# EAGLE board ospi_v13 (EAGLE 6.5.0)
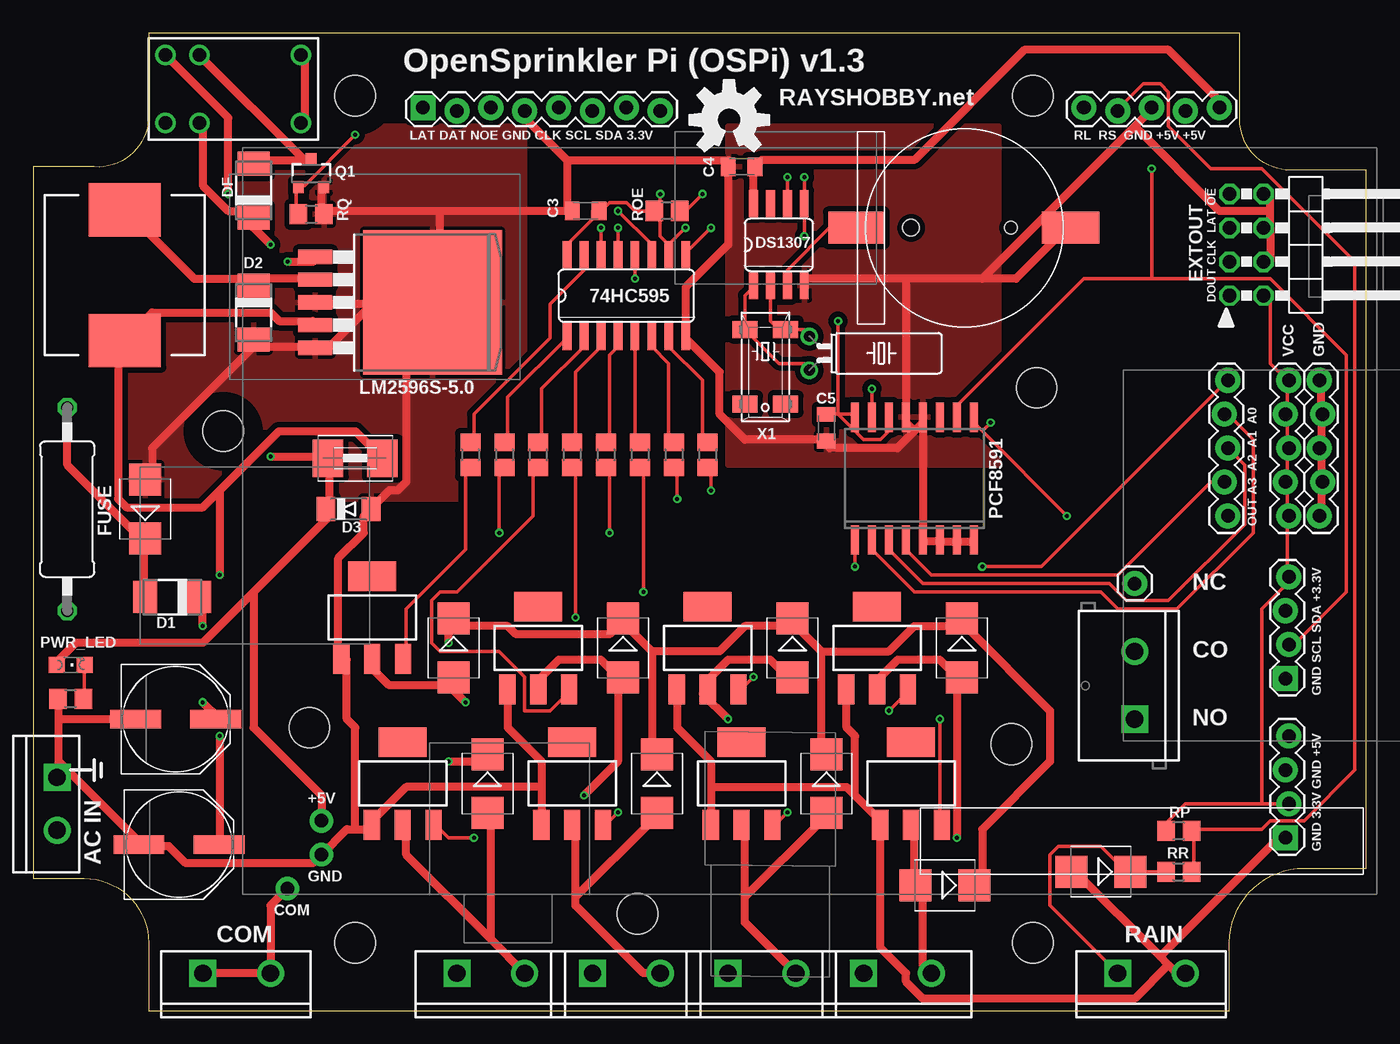
[diagram p0: board, top side]
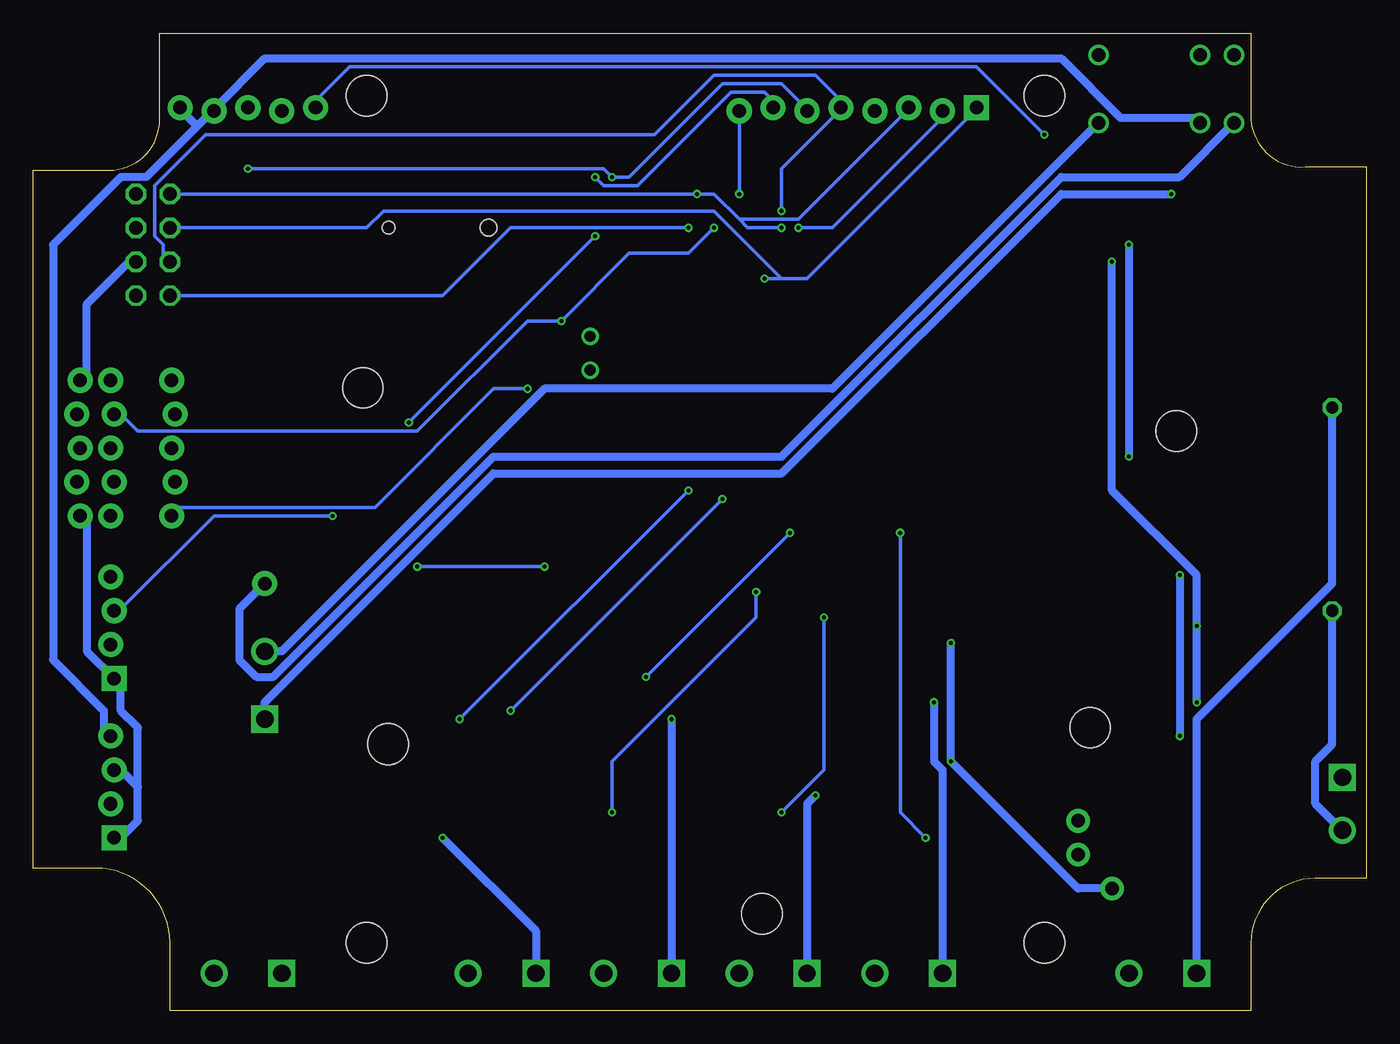
[diagram p1: board, bottom side, seen from below]

Size 99.9 x 73.25 mm. Coordinates in mm from the lower left corner, seen from the top.
Outline: 8.64,0 89.66,0 89.66,5.08 arc-90 95.25,10.67 99.9,10.67 99.9,62.99 94.23,62.99 arc-90 90.42,66.8 90.42,73.25 8.64,73.25 8.64,66.8 arc-90 4.57,63.25 0,63.25 0,9.91 3.81,9.91 arc-90 8.64,5.08 8.64,0
Copper layers (1*16): Top 0.035mm / dielectric 1.5mm / Bottom 0.035mm
Design rules "Fusion_eagle_rule_v1.1": minimum track width 6mil, minimum drill 12mil, track to track 6mil, track to pad 6mil, pad to pad 6mil, via to via 6mil, smd to smd 0mil, copper to edge 10mil, drill to drill 10mil, minimum pad ring 10mil, minimum via ring 6mil, stop-mask expansion 2mil, vias tented up to drill 100mil, thermal gap 10mil
Net classes: 0 default: width 0.254 mm, clearance 0.203 mm; 1 power: width 0.61 mm, clearance 0.203 mm
Holes 3.05 mm at 24.13,5.08 74.93,5.08 24.13,68.58 74.93,68.58
tRestrict: area 21.6,2.5 to 26.7,7.6; area 72.4,2.5 to 77.5,7.6; area 21.6,66 to 26.7,71.1; area 72.4,66 to 77.5,71.1; area 18.2,18.7 to 23.2,23.7; area 42.8,4.7 to 47.9,9.8; area 70.7,17.4 to 75.8,22.5; area 72.6,44.2 to 77.7,49.3; area 11.7,40.9 to 16.8,46
bRestrict: area 11.7,40.9 to 16.8,46; area 72.6,44.2 to 77.7,49.3; area 70.7,17.4 to 75.8,22.5; area 42.8,4.7 to 47.9,9.8; area 18.2,18.7 to 23.2,23.7
vRestrict: area 85.9,54.4 to 86.9,59.9; area 2.5,45 to 7.4,45.7

## Footprints (pad centres in the part's own frame; a part is rotated, then mirrored left to right if it is on the bottom)
SO16 = smd 0.66 x 2.032: 1 -4.445,-3.073; 2 -3.175,-3.073; 3 -1.905,-3.073; 4 -0.635,-3.073; 5 0.635,-3.073; 6 1.905,-3.073; 7 3.175,-3.073; 8 4.445,-3.073; 9 4.445,3.073; 10 3.175,3.073; 11 1.905,3.073; 12 0.635,3.073; 13 -0.635,3.073; 14 -1.905,3.073; 15 -3.175,3.073; 16 -4.445,3.073
BATTCON_12MM_SMT = smd 2.4 x 4.3: P$1 0,11.96 | smd 2.4 x 4.2: P$2 0,-4.1 | hole 0.95: 0,7.5 | hole 1.25: 0,0
PANASONIC_E = smd 3.8 x 1.4: + 3,0; - -3,0
C0805K = smd 1.1 x 1.4: 1 -1,0; 2 1,0
SCREWTERMINAL-5MM-2-X = drill 1.3 pad 2.032 square: 1 0,0 | drill 1.3 pad 2.032: 2 5.08,0
DO-214AC = smd 1.8 x 2.4: A 2.025,0; C -2.025,0
MINIMELF = smd 1.4 x 1.8: A 1.7,0; C -1.7,0
SO08 = smd 0.66 x 2.032: 1 -1.905,-3.073; 2 -0.635,-3.073; 3 0.635,-3.073; 4 1.905,-3.073; 5 1.905,3.073; 6 0.635,3.073; 7 -0.635,3.073; 8 -1.905,3.073
2X04/90 = drill 1.016 octagon: 1 -3.81,-6.35; 2 -3.81,-3.81; 3 -1.27,-6.35; 4 -1.27,-3.81; 5 1.27,-6.35; 6 1.27,-3.81; 7 3.81,-6.35; 8 3.81,-3.81
1812 = smd 2.286 x 2.794: 1 -2.046,0; 2 2.046,0
0411/15 = drill 0.914 octagon: 1 -7.62,0; 2 7.62,0
SCREWTERMINAL-4MM-2-X = drill 1.3 pad 2.032 square: 1 0,0 | drill 1.3 pad 2.032: 2 3.96,0
1X01 = drill 1.016 pad 1.88: 1 0,0
1X05_LOCK = drill 1.016 pad 1.88: 1 0,0.127; 2 2.54,-0.127; 3 5.08,0.127; 4 7.62,-0.127; 5 10.16,0.127
1X04_LOCK = drill 1.016 pad 1.88 square: 1 0,0.127 | drill 1.016 pad 1.88: 2 2.54,-0.127; 3 5.08,0.127; 4 7.62,-0.127
1X08_LOCK = drill 1.016 pad 1.88 square: 1 0,0.127 | drill 1.016 pad 1.88: 2 2.54,-0.127; 3 5.08,0.127; 4 7.62,-0.127; 5 10.16,0.127; 6 12.7,-0.127; 7 15.24,0.127; 8 17.78,-0.127
CDRH125 = smd 5.4 x 4: 1 0,4.9; 2 0,-4.9
TO263-5 = smd 1.067 x 2.54: 1 -3.404,-5.791; 2 -1.702,-5.791; 3 0,-5.791; 4 1.702,-5.791; 5 3.404,-5.791 | smd 10.8 x 10.41: 6 0,3
SO16W = smd 0.6 x 2.2: 1 -4.445,-4.6; 2 -3.175,-4.6; 3 -1.905,-4.6; 4 -0.635,-4.6; 5 0.635,-4.6; 6 1.905,-4.6; 7 3.175,-4.6; 8 4.445,-4.6; 9 4.445,4.6; 10 3.175,4.6; 11 1.905,4.6; 12 0.635,4.6; 13 -0.635,4.6; 14 -1.905,4.6; 15 -3.175,4.6; 16 -4.445,4.6
CHIPLED_0805 = smd 1.2 x 1.2: A 0,-1.05; C 0,1.05
SOT23-3 = smd 0.8 x 0.9: 1 -0.95,-1; 2 0.95,-1; 3 0,1.1
R0805 = smd 1.3 x 1.5: 1 -0.95,0; 2 0.95,0
RELAY-G5V = drill 1.016: 1 5.08,2.54; 2 2.54,2.54; 5 -5.08,2.54; 6 -5.08,-2.54; 9 2.54,-2.54; 10 5.08,-2.54
SCREWTERMINAL-5MM-2 = drill 1.3 pad 2.032 square: 1 0,0 | drill 1.3 pad 2.032: 2 5.08,0
SOT223 = smd 1.219 x 2.235: 1 -2.311,-3.099; 2 0,-3.099; 3 2.311,-3.099 | smd 3.6 x 2.2: 4 0,3.099
1X01-CLEANBIG = drill 1.016 pad 1.778: 1 0,0
SMB = smd 2.4 x 2.4: A 2.2,0; C -2.2,0
OSPI = hole 3.048: 25,-6; 53,6.735; 84.06,-29.465 | hole 3: 77.6,-7.225; 23.1,-32.725
MM20SS = smd 1.27 x 1.88: 1 -2.794,-1.524; 2 2.794,-1.524; 3 2.794,1.524; 4 -2.794,1.524
TC38H = drill 0.813: 1 -1.27,0; 2 1.27,0

## Placement (x,y rotation side)
74HC595  74HC595N  [SO16]  44.45,53.59 0 top
BAT1  [BATTCON_12MM_SMT]  65.79,58.67 270 top
C1  100u/50V  [PANASONIC_E]  10.67,21.84 0 top
C2  100u  [PANASONIC_E]  10.92,12.45 0 top
C3  0.1u  [C0805K]  41.4,59.94 180 top
C4  0.1u  [C0805K]  53.09,63.25 180 top
C5  0.1u  [C0805K]  59.44,43.69 270 top
COM  [SCREWTERMINAL-5MM-2-X]  12.7,2.79 0 top
D1  S1B  [DO-214AC]  10.41,30.99 180 top
D2  SS24  [DO-214AC]  16.51,52.32 270 top
D3  5.6V  [MINIMELF]  23.62,37.59 0 top
DF  S1B  [DO-214AC]  16.51,61.47 90 top
DS1307  DS1307  [SO08]  55.88,57.4 0 top
EXTOUT1  [2X04/90]  96.01,57.4 270 top
F2  [1812]  24.13,41.4 180 top
FUSE  2A  [0411/15]  2.54,37.59 90 top
J0  24VAC IN  [SCREWTERMINAL-4MM-2-X]  1.78,17.48 270 top
JP1  M01PTH  [1X01]  82.55,32 0 top
JP2  [1X05_LOCK]  78.74,67.56 0 top
JP3  [1X04_LOCK]  93.98,12.95 90 top
JP4  [1X04_LOCK]  93.98,24.89 90 top
JP5  [1X05_LOCK]  89.41,47.24 270 top
JP6  [1X05_LOCK]  93.98,47.24 270 top
JP7  [1X05_LOCK]  96.52,37.08 90 top
JP8  [1X08_LOCK]  29.21,67.56 0 top
L1  100uH  [CDRH125]  6.86,55.12 0 top
LM2596S-5.0  [TO263-5]  26.92,53.09 270 top
PCF8591  PCF8591T  [SO16W]  66.04,39.88 0 top
PWR_LED  [CHIPLED_0805]  2.79,25.91 270 top
Q1  2N7002  [SOT23-3]  20.83,62.74 0 top
R1  330  [R0805]  32.77,41.66 270 top
R2  330  [R0805]  35.31,41.66 270 top
R3  330  [R0805]  37.85,41.66 270 top
R4  330  [R0805]  40.39,41.66 270 top
R5  330  [R0805]  42.93,41.66 270 top
R6  330  [R0805]  45.47,41.66 270 top
R7  330  [R0805]  48.01,41.66 270 top
R8  330  [R0805]  50.55,41.66 270 top
RAIN  [SCREWTERMINAL-5MM-2-X]  81.28,2.79 0 top
RELAY  RELAY-2G5Q  [RELAY-G5V]  14.99,69.09 180 top
RLED  1K  [R0805]  2.79,23.37 180 top
RLPORT  [SCREWTERMINAL-5MM-2]  82.55,21.84 90 top
ROE  10K  [R0805]  47.5,59.94 180 top
RP  330  [R0805]  85.85,13.46 180 top
RQ  10K  [R0805]  20.83,59.69 0 top
RR  4.7K  [R0805]  85.85,10.41 0 top
S12  [SCREWTERMINAL-5MM-2-X]  31.75,2.79 0 top
S34  [SCREWTERMINAL-5MM-2-X]  41.91,2.79 0 top
S56  [SCREWTERMINAL-5MM-2-X]  52.07,2.79 0 top
S78  [SCREWTERMINAL-5MM-2-X]  62.23,2.79 0 top
T1  MAC97  [SOT223]  25.4,29.46 0 top
T2  MAC97  [SOT223]  27.69,17.02 0 top
T3  MAC97  [SOT223]  37.85,27.18 0 top
T4  MAC97  [SOT223]  40.39,17.02 0 top
T5  MAC97  [SOT223]  50.55,27.18 0 top
T6  MAC97  [SOT223]  53.09,17.02 0 top
T7  MAC97  [SOT223]  63.25,27.18 0 top
T8  MAC97  [SOT223]  65.79,17.02 0 top
TP1  [1X01-CLEANBIG]  19.05,9.14 0 top
TP2  [1X01-CLEANBIG]  21.59,11.68 0 top
TP3  [1X01-CLEANBIG]  21.59,14.22 0 top
TVS0  SMBJ48CA  [SMB]  8.38,37.59 90 top
TVS1  [SMB]  31.5,27.18 270 top
TVS2  [SMB]  34.04,17.02 270 top
TVS3  [SMB]  44.2,27.18 270 top
TVS4  [SMB]  46.74,17.02 270 top
TVS5  [SMB]  56.9,27.18 270 top
TVS6  [SMB]  59.44,17.02 270 top
TVS7  [SMB]  69.6,27.18 270 top
TVS8  [SMB]  68.33,9.4 180 top
TVSR  [SMB]  80.01,10.41 180 top
U$2  OSPI  [OSPI]  98.3,13.97 180 top
X1  32.768kHz  [MM20SS]  54.86,48.26 270 top
X1'  32.768kHz  [TC38H]  58.17,49.28 270 top

## Library data of the parts
74HC595 COM J0 JP1-JP8 RAIN RLPORT S12 S34 S56 S78 T1-T8 = SparkFun
BAT1 L1 Q1 RELAY = SparkFunNew
C1 C2 = resistor
C3-C5 DS1307 F2 PWR_LED TP1-TP3 = adafruit
D1-D3 DF TVS0 TVS1-TVS8 TVSR = diode
EXTOUT1 = pinhead
FUSE R1-R8 RLED ROE RP RQ RR = rcl
LM2596S-5.0 = national-semiconductor; MF: NATIONAL SEMICONDUCTOR; MPN: LM2596S-ADJ/NOPB; OC_FARNELL: 9494367; OC_NEWARK: 41K3842
PCF8591 = micro-philips; MPN: PCF8591T/2,512; OC_FARNELL: 1826767; OC_NEWARK: 70R6911
U$2 = RaspberryPi
X1 X1' = crystal; OC_FARNELL: unknown; OC_NEWARK: unknown

## Nets
24VAC [power]: COM.1 COM.2 D1.A FUSE.2 TP1.1 TVS0.C TVS1.C TVS2.C TVS3.C TVS4.C TVS5.C TVS6.C TVS7.C TVS8.C
A1: 74HC595.13 EXTOUT1.1 JP8.3 ROE.1
ACIN [power]: FUSE.1 J0.2
AIN0: JP5.1 PCF8591.1
AIN1: JP5.2 PCF8591.2
AIN2: JP5.3 PCF8591.3
AIN3: JP5.4 PCF8591.4
AOUT: JP5.5 PCF8591.15
CO [power]: RELAY.5 RELAY.6 RLPORT.2
D5: 74HC595.14 JP8.2
D6: 74HC595.11 EXTOUT1.5 JP8.5
D7: 74HC595.12 EXTOUT1.3 JP8.1
GND [power]: 74HC595.8 BAT1.P$1 C1.- C2.- C3.2 C4.2 C5.2 D2.A D3.A DS1307.4 EXTOUT1.2 EXTOUT1.4 EXTOUT1.6 J0.1 JP2.3 JP3.1 JP3.3 JP4.1 JP7.1 JP7.2 JP7.3 JP7.4 JP7.5 JP8.4 LM2596S-5.0.3 LM2596S-5.0.5 LM2596S-5.0.6 PCF8591.5 PCF8591.6 PCF8591.7 PCF8591.8 PCF8591.12 PCF8591.13 Q1.2 RAIN.2 RLED.2 RQ.2 T1.1 T2.1 T3.1 T4.1 T5.1 T6.1 T7.1 T8.1 TP2.1 TVS0.A TVSR.A
N$1: PWR_LED.C RLED.1
N$2 [power]: C1.+ D1.C LM2596S-5.0.1
N$3: R1.2 T1.3
N$4: 74HC595.5 R6.1
N$5: 74HC595.6 R7.1
N$7: 74HC595.7 R8.1
N$8 [power]: D2.C L1.1 LM2596S-5.0.2
N$9: DS1307.1 X1'.2 X1.1
N$10: 74HC595.4 R5.1
N$11: 74HC595.3 R4.1
N$12: 74HC595.2 R3.1
N$13: 74HC595.1 R2.1
N$14: 74HC595.15 R1.1
N$15: R2.2 T2.3
N$16 [power]: S12.1 T1.2 TVS1.A
N$17 [power]: S12.2 T2.2 TVS2.A
N$18 [power]: S34.1 T3.2 TVS3.A
N$19: R3.2 T3.3
N$20 [power]: S34.2 T4.2 TVS4.A
N$21: R4.2 T4.3
N$22 [power]: S56.1 T5.2 TVS5.A
N$23 [power]: S56.2 T6.2 TVS6.A
N$24 [power]: S78.1 T7.2 TVS7.A
N$25 [power]: S78.2 T8.2 TVS8.A
N$26: R5.2 T5.3
N$27: R6.2 T6.3
N$28: R7.2 T7.3
N$29: R8.2 T8.3
N$30: DS1307.2 X1'.1 X1.4
N$31: RAIN.1 RR.1 TVSR.C
N$36: BAT1.P$2 DS1307.3
N$77 [power]: DF.A Q1.3 RELAY.9
NC [power]: JP1.1 RELAY.1
NO [power]: RELAY.10 RLPORT.1
QH*: 74HC595.9 EXTOUT1.7
RL: JP2.1 Q1.1 RQ.1
RS: JP2.2 RP.1 RR.2
SCL: DS1307.6 JP4.2 JP8.6 PCF8591.10
SDA: DS1307.5 JP4.3 JP8.7 PCF8591.9
VCC: 74HC595.10 74HC595.16 C3.1 C5.1 EXTOUT1.8 JP3.2 JP4.4 JP6.1 JP6.2 JP6.3 JP6.4 JP6.5 JP8.8 PCF8591.14 PCF8591.16 ROE.2 RP.2
VIN [power]: C4.1 D3.C DF.C DS1307.8 F2.2 JP2.4 JP2.5 JP3.4 PWR_LED.A RELAY.2 TP3.1
VIN_PRE [power]: C2.+ F2.1 L1.2 LM2596S-5.0.4

## Tracks (layer width: path | path; a pad name or v marks a point on that pad's centre or on a via)
24VAC  (via drill 0.3)
  Top 0.61: 46.35,26.92 46.35,19.3 TVS4.C | 46.35,26.92 44.45,28.83 TVS3.C 43.81,28.83 43.18,28.19 36.2,28.19 35.56,28.83 31.75,28.83 TVS1.C 31.11,28.83 v31.11,27.56 | 59.05,26.92 57.15,28.83 TVS5.C 56.52,28.83 53.34,28.83 51.44,26.92 46.35,26.92 | 59.05,26.92 59.05,19.3 TVS6.C | 59.05,26.92 64.14,26.92 66.04,28.83 69.22,28.83 TVS7.C 69.85,28.83 76.2,22.48 76.2,18.67 71.12,13.59 71.12,9.78 TVS8.C | 8.26,35.18 8.26,31.37 D1.A | FUSE.2 2.54,40.89 8.26,35.18 | 8.26,35.18 TVS0.C | COM.1 COM.2 17.78,7.87 TP1.1 | v31.11,18.67 33.66,18.67 TVS2.C
  Bottom 0.61: TP1.1 21.59,9.14 v31.11,18.67 v31.11,27.56 | FUSE.2 2.54,32 12.7,21.84 COM.1
A1  (via drill 0.3)
  Top 0.254: v50.16,61.21 48.9,59.94 ROE.1 | v43.81,58.67 74HC595.13
  Bottom 0.254: EXTOUT1.1 v50.16,61.21 48.9,61.21 46.99,59.31 | v43.81,58.67 46.35,58.67 46.99,59.31 | 46.99,59.31 42.55,59.31 34.29,67.56 JP8.3
ACIN
  Bottom 0.61: FUSE.1 2.54,19.94 3.81,18.67 3.81,15.49 1.91,13.59 J0.2
AIN0  (via drill 0.3)
  Top 0.254: v61.59,33.27 PCF8591.1 | v71.12,33.27 75.56,33.27 JP5.1
  Bottom 0.254: v71.12,33.27 v61.59,33.27
AIN1
  Top 0.254: PCF8591.2 62.87,34.54 66.04,31.37 80.01,31.37 81.28,30.1 85.72,30.1 91.44,35.81 91.44,42.8 89.53,44.7 JP5.2
AIN2
  Top 0.254: PCF8591.3 64.14,34.54 66.67,32 80.64,32 81.92,30.73 85.09,30.73 90.81,36.45 90.81,40.89 JP5.3
AIN3
  Top 0.254: PCF8591.4 65.41,34.54 67.31,32.64 81.28,32.64 88.27,39.62 JP5.4
AOUT  (via drill 0.3)
  Top 0.254: v62.87,46.61 PCF8591.15
  Bottom 0.254: v62.87,46.61 65.41,46.61 74.3,37.72 88.9,37.72 JP5.5
CO
  Top 0.61: RELAY.5 20.32,66.93 20.32,71.37 RELAY.6
  Bottom 0.61: RLPORT.2 81.28,26.92 61.59,46.61 40.01,46.61 RELAY.5
D5  (via drill 0.3)
  Top 0.254: v42.55,58.67 74HC595.14
  Bottom 0.254: v42.55,58.67 40.01,58.67 31.75,66.93 JP8.2
D6  (via drill 0.3)
  Top 0.254: 74HC595.11 46.35,57.4 v43.81,59.94
  Bottom 0.254: v43.81,59.94 43.81,63.12 39.37,67.56 JP8.5 39.37,68.2 41.27,70.1 48.9,70.1 53.34,65.66 87,65.66 90.81,61.85 90.81,58.04 90.17,57.4 90.17,56.13 EXTOUT1.5
D7  (via drill 0.3)
  Top 0.254: v45.09,54.86 74HC595.12
  Bottom 0.254: 43.81,54.86 41.91,54.86 29.21,67.56 JP8.1 | 43.81,54.86 v45.09,54.86 | EXTOUT1.3 74.93,58.67 73.66,59.94 48.9,59.94 43.81,54.86
GND
  Top 0.61: 1.91,18.67 1.91,18.03 J0.1 | 1.91,18.67 1.91,21.84 | 1.91,21.84 1.91,23.11 RLED.2 | 1.91,21.84 C1.- | 1.91,18.67 7.62,12.95 C2.- 8.26,12.32 10.16,12.32 11.43,11.05 20.95,11.05 TP2.1 23.5,13.59 24.13,13.59 | 24.13,13.59 25.4,13.59 T2.1 25.4,14.22 27.94,16.76 38.1,16.76 | 38.1,16.76 38.1,18.67 35.56,21.21 35.56,23.75 T3.1 | 38.1,16.76 38.1,14.22 T4.1 | 24.13,13.59 24.13,21.21 23.5,21.84 23.5,26.29 T1.1 22.86,26.92 22.86,33.91 24.77,35.81 24.77,37.08 D3.A 25.4,37.72 26.67,38.99 27.3,38.99 27.94,39.62 27.94,52.96 | Q1.2 21.59,61.85 21.59,59.94 RQ.2 22.23,59.94 30.48,59.94 | 40.01,63.75 40.01,59.94 | 40.01,63.75 36.83,66.93 JP8.4 | 40.01,63.75 52.07,63.75 C4.2 52.07,63.12 52.07,57.4 48.9,54.23 74HC595.8 48.9,50.42 51.44,47.88 51.44,44.7 53.34,42.8 59.05,42.8 C5.2 59.69,42.16 64.77,42.16 66.04,43.43 | 40.01,59.94 30.48,59.94 | 40.01,59.94 C3.2 | 16.51,49.78 8.89,42.16 8.89,40.26 TVS0.A | 16.51,49.78 20.95,49.78 LM2596S-5.0.5 21.59,49.78 22.23,49.78 25.4,52.96 | 16.51,49.78 D2.A | 27.94,52.96 29.84,52.96 LM2596S-5.0.6 | 27.94,52.96 25.4,52.96 | 25.4,52.96 21.59,52.96 LM2596S-5.0.3 | 25.4,52.96 LM2596S-5.0.6 | 30.48,59.94 30.48,53.59 LM2596S-5.0.6 | 27.94,52.96 LM2596S-5.0.6 | 67.94,35.18 66.67,35.18 PCF8591.5 66.67,44.07 | 67.94,35.18 69.22,35.18 | 67.94,35.18 PCF8591.6 | 69.22,35.18 70.48,35.18 PCF8591.8 | 69.22,35.18 PCF8591.7 | 66.67,44.07 66.04,43.43 | 66.04,43.43 65.41,44.07 PCF8591.13 65.41,54.86 | 66.67,44.07 PCF8591.12 | 71.12,54.86 73.66,54.86 77.47,58.67 BAT1.P$1 | 71.12,54.86 65.41,54.86 | 65.41,54.86 57.78,54.86 DS1307.4 | 71.12,54.86 82.55,66.29 | 82.55,66.29 83.82,67.56 JP2.3
  Top 0.61: 92.71,58.67 92.71,56.13 EXTOUT1.6 | 92.71,58.67 92.71,59.94 | 92.71,59.94 92.71,61.21 EXTOUT1.2 | 92.71,58.67 EXTOUT1.4 | 96.52,44.7 96.52,42.16 | 96.52,44.7 96.52,47.24 JP7.5 | 96.52,44.7 JP7.4 | 96.52,42.16 96.52,39.62 | 96.52,42.16 JP7.3 | 96.52,39.62 96.52,37.08 JP7.1 | 96.52,39.62 JP7.2 | 50.8,16.76 50.8,18.67 48.26,21.21 48.26,23.75 T5.1 | 50.8,16.76 50.8,14.22 T6.1 | 61.59,16.13 60.96,16.76 50.8,16.76 | 61.59,16.13 63.5,14.22 T8.1 63.5,13.59 63.5,4.7 65.41,2.79 65.41,2.16 66.67,0.89 82.55,0.89 85.09,3.43 | 61.59,16.13 61.59,20.57 60.96,21.21 60.96,23.75 T7.1 | 85.09,3.43 85.72,2.79 RAIN.2 | 85.09,3.43 84.45,4.06 | 84.45,4.06 78.11,10.41 TVSR.A | 84.45,4.06 93.34,12.95 JP3.1 | 82.55,66.29 88.9,59.94 92.71,59.94
  Bottom 0.61: JP7.1 95.89,37.08 95.89,26.92 JP4.1 93.34,24.38 93.34,22.48 92.08,21.21 92.08,16.76 | EXTOUT1.6 92.71,56.13 95.89,52.96 95.89,47.24 JP7.5 | 92.08,16.76 93.34,18.03 JP3.3 | 92.08,16.76 92.08,14.22 93.34,12.95 JP3.1
  pour Top (isolate 0.406): 0,66.29 36.83,66.29 36.83,38.35 0,38.35
  pour Top (isolate 0.406): 52.07,66.29 72.39,66.29 72.39,40.89 52.07,40.89
N$1
  Top 0.254: PWR_LED.C 3.81,25.65 3.81,23.75 RLED.1
N$2  (via drill 0.3)
  Top 0.61: v12.7,28.83 12.7,30.73 D1.C | v12.7,23.11 13.97,21.84 C1.+ | v19.05,56.13 20.95,56.13 LM2596S-5.0.1
  Bottom 0.61: v12.7,23.11 v12.7,28.83 12.7,32.64 19.05,38.99 v19.05,56.13
N$3
  Top 0.254: R1.2 32.38,40.26 32.38,34.54 27.94,30.1 27.94,26.92 T1.3
N$4
  Top 0.254: 74HC595.5 45.09,42.8 R6.1
N$5
  Top 0.254: 74HC595.6 46.35,49.78 47.62,48.51 47.62,42.8 R7.1
N$7
  Top 0.254: 74HC595.7 47.62,49.78 50.16,47.24 50.16,42.8 R8.1
N$8
  Top 0.61: 16.51,54.86 20.95,54.86 LM2596S-5.0.2 | 16.51,54.86 12.06,54.86 6.99,59.94 L1.1 | 16.51,54.86 D2.C
N$9
  Top 0.254: DS1307.1 53.98,54.23 53.34,53.59 X1.1 55.88,48.51 57.78,48.51 X1'.2
N$10
  Top 0.254: 74HC595.4 43.81,49.78 43.18,49.15 43.18,42.8 R5.1
N$11
  Top 0.254: 74HC595.3 42.55,49.78 40.64,47.88 40.64,42.8 R4.1
N$12
  Top 0.254: 74HC595.2 41.27,49.78 38.1,46.61 38.1,42.8 R3.1
N$13
  Top 0.254: R2.1 35.56,42.8 35.56,45.97 40.01,50.42 74HC595.1
N$14
  Top 0.254: 74HC595.15 41.27,55.5 38.73,52.96 38.73,50.42 33.02,44.7 33.02,42.8 R1.1
N$15  (via drill 0.3)
  Top 0.254: v34.92,35.81 34.92,40.26 R2.2 | v33.02,12.95 31.11,12.95 30.48,13.59 T2.3
  Bottom 0.254: v34.92,35.81 34.92,14.86 v33.02,12.95
N$16  (via drill 0.3)
  Top 0.61: T1.2 25.4,25.65 26.67,24.38 31.11,24.38 | 31.11,24.38 v32.38,23.11 | 31.11,24.38 TVS1.A
  Bottom 0.61: S12.1 31.75,18.03 32.38,18.67 v32.38,23.11
N$17
  Top 0.61: S12.2 34.29,5.33 | 34.29,5.33 27.94,11.68 27.94,13.59 T2.2 | 34.29,5.33 34.29,14.22 TVS2.A
N$18  (via drill 0.3)
  Top 0.61: T3.2 38.1,24.38 38.1,25.02 39.37,26.29 42.55,26.29 43.81,25.02 TVS3.A 43.81,24.38 43.81,18.67 v41.27,16.13
  Bottom 0.61: S34.1 41.91,15.49 v41.27,16.13
N$19
  Top 0.254: R3.2 37.47,40.26 37.47,37.08 31.75,31.37 30.48,31.37 29.84,30.73 29.84,27.56 30.48,26.92 34.92,26.92 36.83,25.02 36.83,22.48 38.73,22.48 40.01,23.75 T3.3
N$20
  Top 0.61: 40.64,8.51 40.64,7.87 45.72,2.79 S34.2 | 40.64,8.51 40.64,13.59 T4.2 | 40.64,8.51 46.35,14.22 TVS4.A
N$21  (via drill 0.3)
  Top 0.254: v40.64,29.46 40.64,40.26 R4.2 | v43.81,14.86 43.18,14.22 T4.3
  Bottom 0.254: v40.64,29.46 40.64,18.03 v43.81,14.86
N$22  (via drill 0.3)
  Top 0.61: TVS5.A 56.52,25.02 55.24,26.29 52.07,26.29 50.8,25.02 50.8,24.38 T5.2 50.16,23.75 v52.07,21.84
  Bottom 0.61: v52.07,21.84 S56.1
N$23
  Top 0.61: 53.34,8.51 53.34,6.6 S56.2 | 53.34,8.51 53.34,13.59 T6.2 | 53.34,8.51 59.05,14.22 TVS6.A
N$24  (via drill 0.3)
  Top 0.61: T7.2 63.5,24.38 63.5,25.02 64.77,26.29 67.94,26.29 69.22,25.02 TVS7.A 69.22,24.38 v69.22,12.95
  Bottom 0.61: S78.1 62.23,5.97 v69.22,12.95
N$25
  Top 0.61: T8.2 66.04,13.59 66.04,9.78 TVS8.A 66.67,9.14 66.67,3.43 S78.2
N$26  (via drill 0.3)
  Top 0.254: v43.18,35.81 43.18,40.26 R5.2 | v53.98,25.02 53.34,24.38 T5.3
  Bottom 0.254: v53.98,25.02 v43.18,35.81
N$27  (via drill 0.3)
  Top 0.254: v45.72,31.37 45.72,40.26 R6.2 | v56.52,14.86 55.88,14.22 T6.3
  Bottom 0.254: v45.72,31.37 45.72,29.46 56.52,18.67 v56.52,14.86
N$28  (via drill 0.3)
  Top 0.254: v48.26,38.35 48.26,40.26 R7.2 | v64.14,22.48 65.41,23.75 T7.3
  Bottom 0.254: v64.14,22.48 v48.26,38.35
N$29  (via drill 0.3)
  Top 0.254: v50.8,38.99 50.8,40.26 R8.2 | v67.94,21.84 67.94,14.22 T8.3
  Bottom 0.254: v67.94,21.84 v50.8,38.99
N$30
  Top 0.254: X1'.1 57.78,51.05 X1.4 55.88,51.05 55.24,51.69 DS1307.2
N$31
  Top 0.254: RR.1 TVSR.C 81.92,10.41 80.01,12.32 76.83,12.32 76.2,11.68 76.2,7.87 RAIN.1
N$36
  Top 0.254: DS1307.3 56.52,55.5 59.69,58.67 BAT1.P$2
N$77
  Top 0.61: 20.32,63.75 16.51,63.75 DF.A | 20.32,63.75 20.95,63.75 Q1.3 | 20.32,63.75 RELAY.9
NC
  Bottom 0.61: RELAY.1 13.97,62.48 22.86,62.48 43.81,41.53 65.41,41.53 81.92,25.02 83.19,25.02 84.45,26.29 84.45,30.1 JP1.1
NO  (via drill 0.3)
  Top 0.61: RELAY.10 14.61,66.93 v14.61,61.21
  Bottom 0.61: v14.61,61.21 22.86,61.21 43.81,40.26 65.41,40.26 82.55,23.11 RLPORT.1
QH*  (via drill 0.3)
  Top 0.254: v50.8,58.67 48.9,56.77 74HC595.9
  Bottom 0.254: v50.8,58.67 64.14,58.67 69.22,53.59 EXTOUT1.7
RL  (via drill 0.3)
  Top 0.254: 19.68,61.85 19.68,59.94 RQ.1 | 19.68,61.85 20.32,61.85 v24.13,65.66 | 19.68,61.85 Q1.1
  Bottom 0.254: v24.13,65.66 29.21,70.74 76.2,70.74 78.74,68.2 JP2.1
RS
  Top 0.254: RR.2 87,10.41 87,12.95 RP.1 87,13.59 92.08,13.59 92.71,14.22 95.25,14.22 99.06,18.03 99.06,56.13 92.08,63.12 88.27,63.12 85.09,66.29 85.09,68.83 84.45,69.47 83.19,69.47 81.28,67.56 JP2.2
SCL  (via drill 0.3)
  Top 0.254: v56.52,62.48 DS1307.6 | PCF8591.10 69.22,45.34 78.74,54.86 83.82,54.86 | 83.82,54.86 92.71,54.86 98.42,49.15 98.42,31.37 94.61,27.56 JP4.2 | 83.82,54.86 v83.82,63.12
  Bottom 0.254: JP8.6 41.91,67.56 43.81,69.47 48.26,69.47 55.24,62.48 v56.52,62.48 57.15,63.12 v83.82,63.12
SDA  (via drill 0.3)
  Top 0.254: v57.78,62.48 DS1307.5 v57.78,58.04 | v77.47,37.08 71.12,43.43 | 71.12,43.43 70.48,44.07 PCF8591.9 | 71.12,43.43 v71.75,44.07
  Bottom 0.254: v57.78,62.48 57.15,61.85 54.61,61.85 47.62,68.83 45.09,68.83 44.45,68.2 JP8.7 | v77.47,37.08 86.36,37.08 93.34,30.1 JP4.3 | v71.75,44.07 v57.78,58.04
VCC  (via drill 0.3)
  Top 0.254: JP3.2 92.08,15.49 | 92.08,15.49 86.36,15.49 85.09,14.22 85.09,13.59 RP.2 | 93.98,42.16 93.98,39.62 | 93.98,37.08 93.98,32.64 JP4.4 93.98,32 92.08,30.1 92.08,15.49 | 93.98,37.08 93.98,39.62 | 93.98,39.62 JP6.4 | 93.98,37.08 JP6.5 | 46.99,59.94 46.99,58.04 47.62,57.4 | 47.62,57.4 74HC595.10 47.62,56.77 | 74HC595.16 40.01,57.4 41.91,59.31 41.91,59.94 C3.1 42.55,59.94 43.18,60.58 44.45,60.58 45.09,59.94 ROE.2 46.99,59.94 | 46.99,59.94 v46.99,61.21 | 93.98,47.24 92.71,48.51 92.71,53.59 EXTOUT1.8 | 60.33,44.7 61.59,44.7 PCF8591.16 | 60.33,44.7 59.69,44.7 C5.1 | PCF8591.14 64.14,43.43 63.5,42.8 62.23,42.8 60.33,44.7 | v60.33,51.69 60.33,44.7 | 93.98,44.7 93.98,47.24 | 93.98,47.24 JP6.1 | v48.9,58.67 47.62,57.4 | 93.98,44.7 93.98,42.16 | 93.98,42.16 JP6.3 | 93.98,44.7 JP6.2
  Bottom 0.254: v46.99,61.21 JP8.8 | JP6.2 93.34,44.7 92.08,43.43 71.12,43.43 62.87,51.69 v60.33,51.69 55.24,56.77 50.8,56.77 v48.9,58.67
VIN  (via drill 0.3)
  Top 0.61: 16.51,31.37 22.23,37.08 D3.C 22.23,37.72 22.23,40.89 F2.2 21.59,41.53 v17.78,41.53 | 16.51,31.37 12.7,27.56 3.17,27.56 1.91,26.29 PWR_LED.A | TP3.1 21.59,16.13 16.51,21.21 16.51,31.37 | DS1307.8 53.98,63.12 C4.1 54.61,63.75 66.04,63.75 74.3,72.01 85.09,72.01 88.9,68.2 JP2.5 | 15.24,59.94 14.61,59.94 12.7,61.85 12.7,66.29 RELAY.2 | 15.24,59.94 16.51,59.94 DF.C | 15.24,59.94 v17.78,57.4
  Bottom 0.61: 86.36,67.56 87.63,66.29 | 87.63,66.29 91.44,62.48 93.34,62.48 98.42,57.4 98.42,26.29 94.61,22.48 94.61,20.57 JP3.4 | 86.36,67.56 82.55,71.37 22.86,71.37 18.41,66.93 12.7,66.93 RELAY.2 | 86.36,67.56 JP2.4 | 87.63,66.29 88.9,67.56 JP2.5 | v17.78,57.4 v17.78,41.53
VIN_PRE  (via drill 0.3)
  Top 0.61: LM2596S-5.0.4 20.95,51.69 18.41,51.69 17.78,52.32 8.89,52.32 6.99,50.42 L1.2 6.35,49.78 6.35,38.35 6.99,37.72 12.7,37.72 13.97,38.99 | 13.97,38.99 18.41,43.43 24.13,43.43 26.04,41.53 F2.1 | v13.97,20.57 13.97,12.95 C2.+ | 13.97,38.99 v13.97,32.64
  Bottom 0.61: v13.97,32.64 v13.97,20.57

## Text on the board
tNames: OpenSprinkler Pi (OSPi) v1.3 | RAYSHOBBY.net | LAT DAT NOE GND CLK SCL SDA 3.3V | RL RS GND +5V +5V | EXTOUT | DOUT CLK LAT !OE | VCC | GND | OUT A3 A2 A1 A0 | NC | CO | GND SCL SDA +3.3V | NO | +5V | GND 3.3V GND +5V | AC IN | GND | COM | RAIN
BoxDim: Serpac WM-032-I Enclosure | All units are in inch | Left | Right | Front | Bottom